# Altium PCB M_DOT_2_SOM.PcbDoc
Units mil, origin at the board's own origin, x right, y up, seen from the top; angles counter-clockwise.
Board outline 873.14 x 1656.07 mil, 6 copper layers (Top Layer [SIG], Mid Layer 1 [GND], Mid Layer 2 [SIG], Mid Layer 3 [3V3], Mid Layer 4 [GND], Bottom Layer [SIG]), stack 63.562 mil thick; 36 components, 52 nets, 312 pads, 71 vias.
Unrouted connection lines stored in the file: 100.
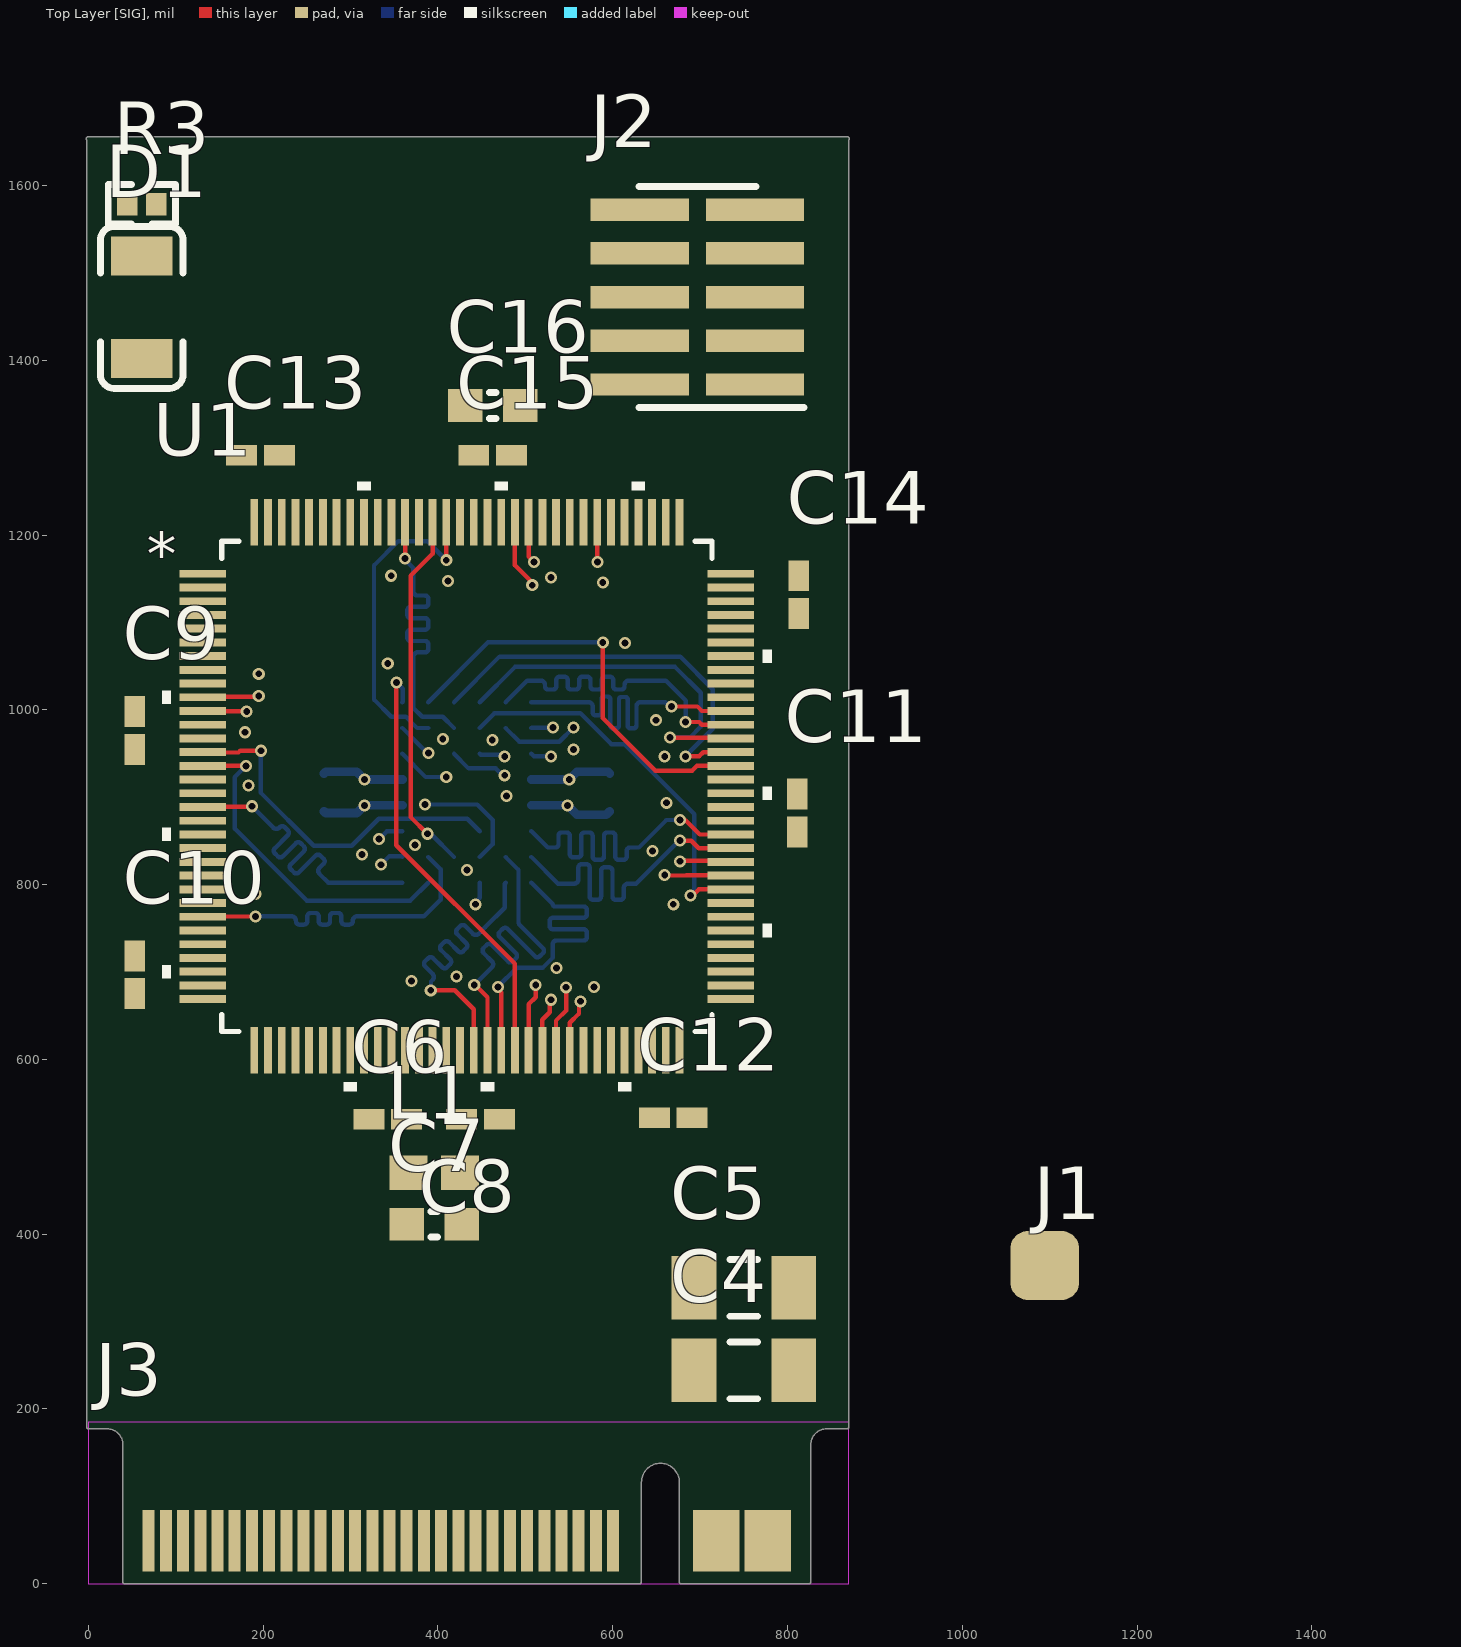
[diagram p0: Top Layer [SIG] view]
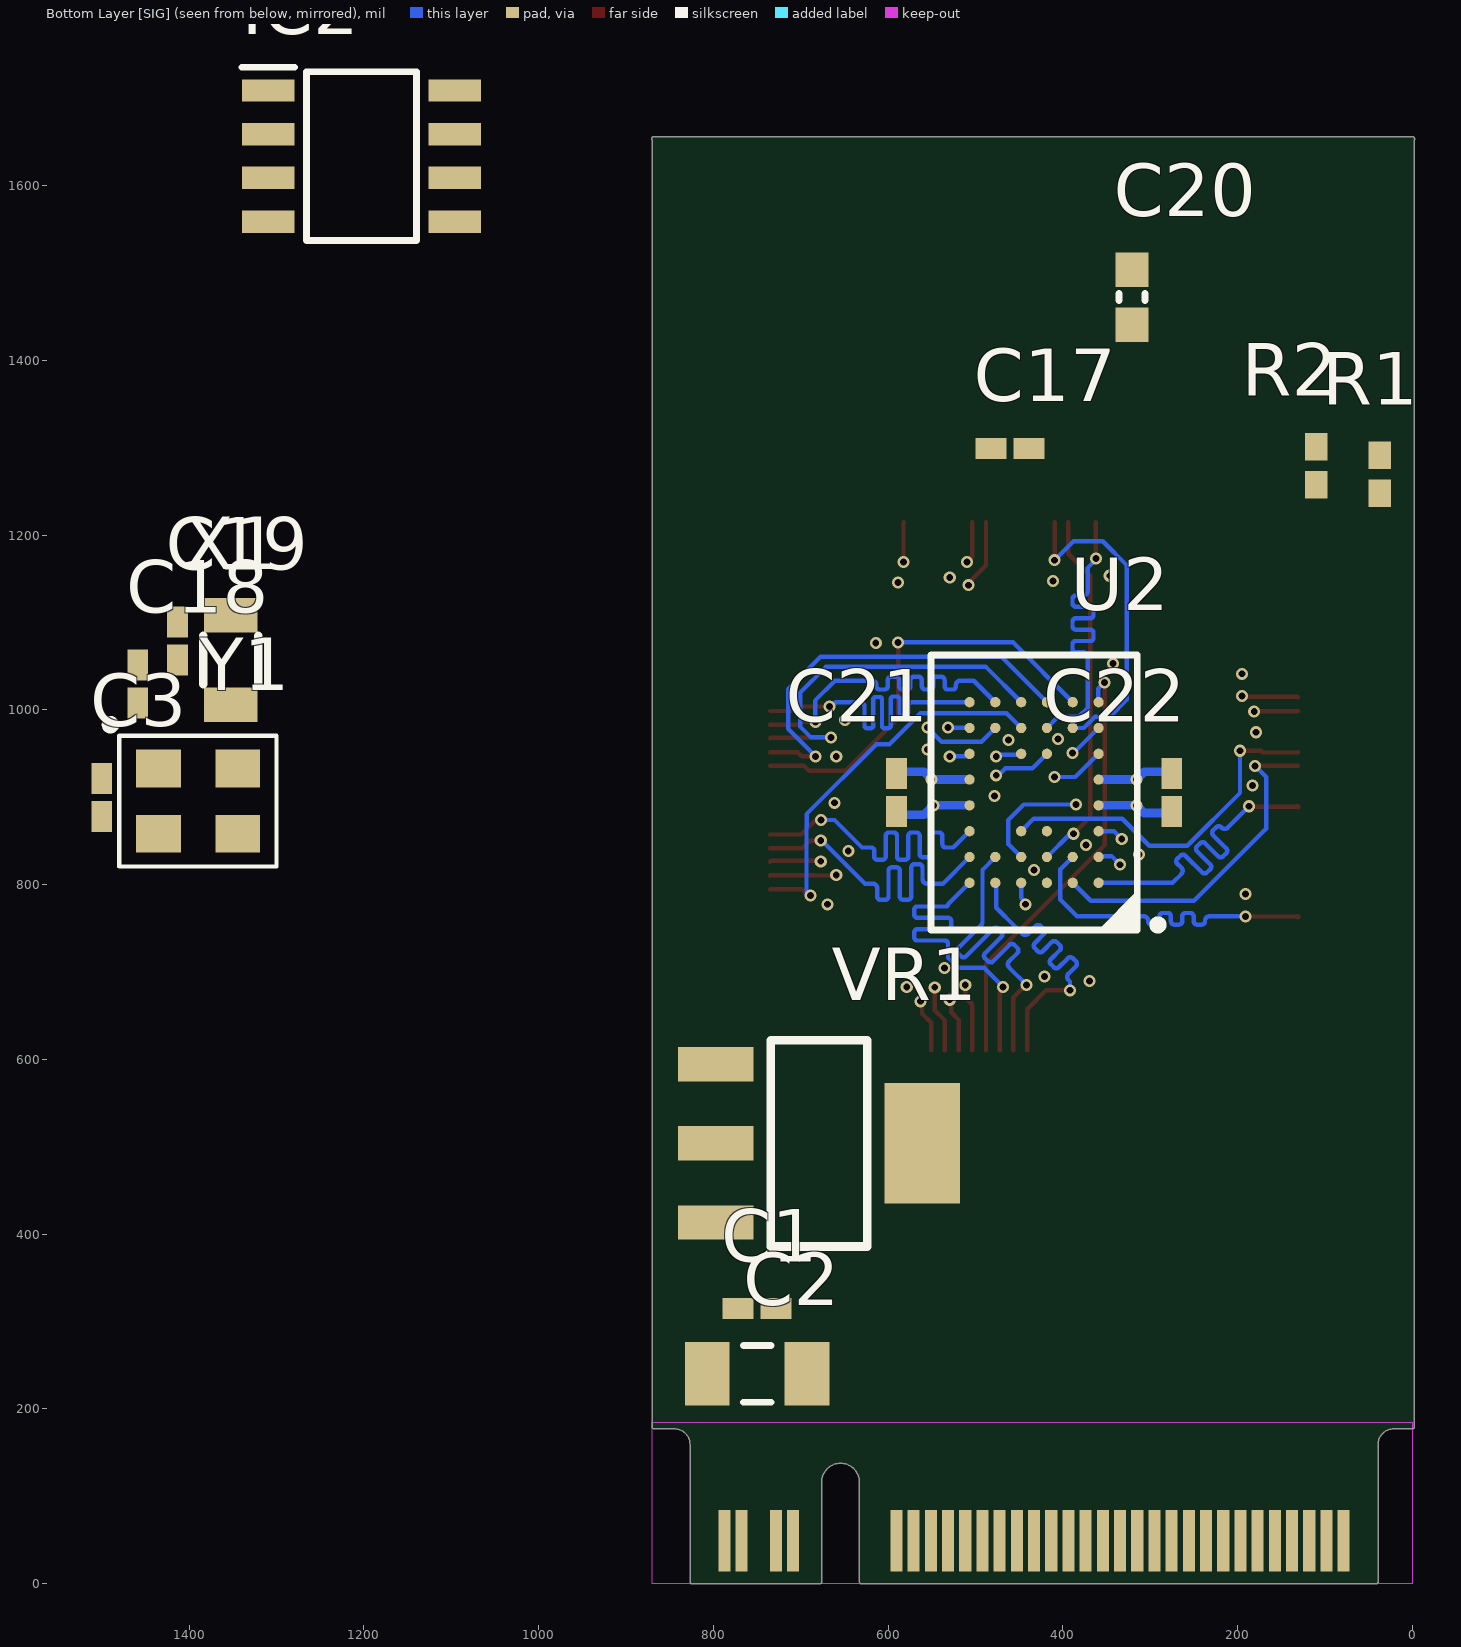
[diagram p1: Bottom Layer [SIG] view, seen from below]
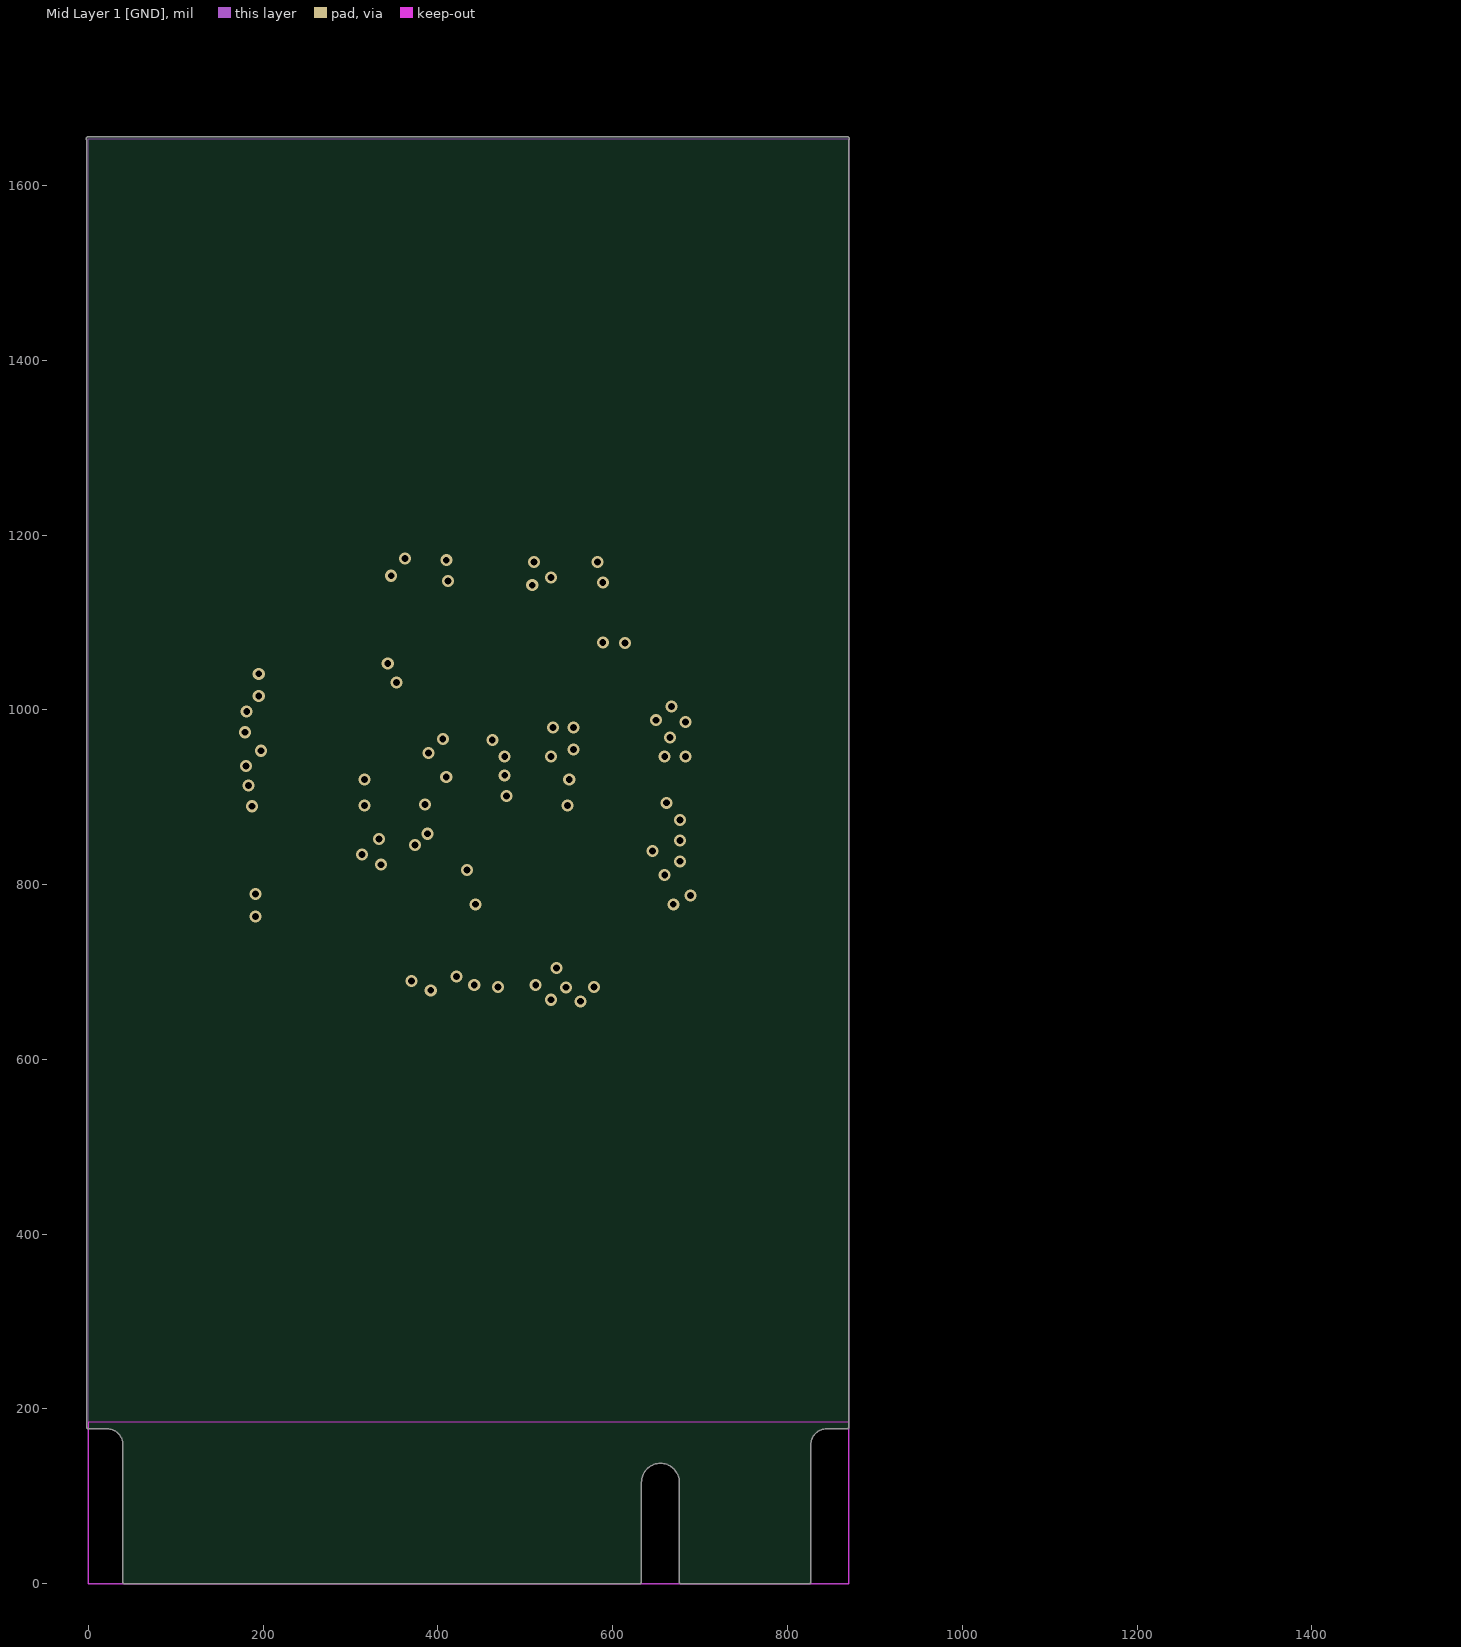
[diagram p2: Mid Layer 1 [GND]]
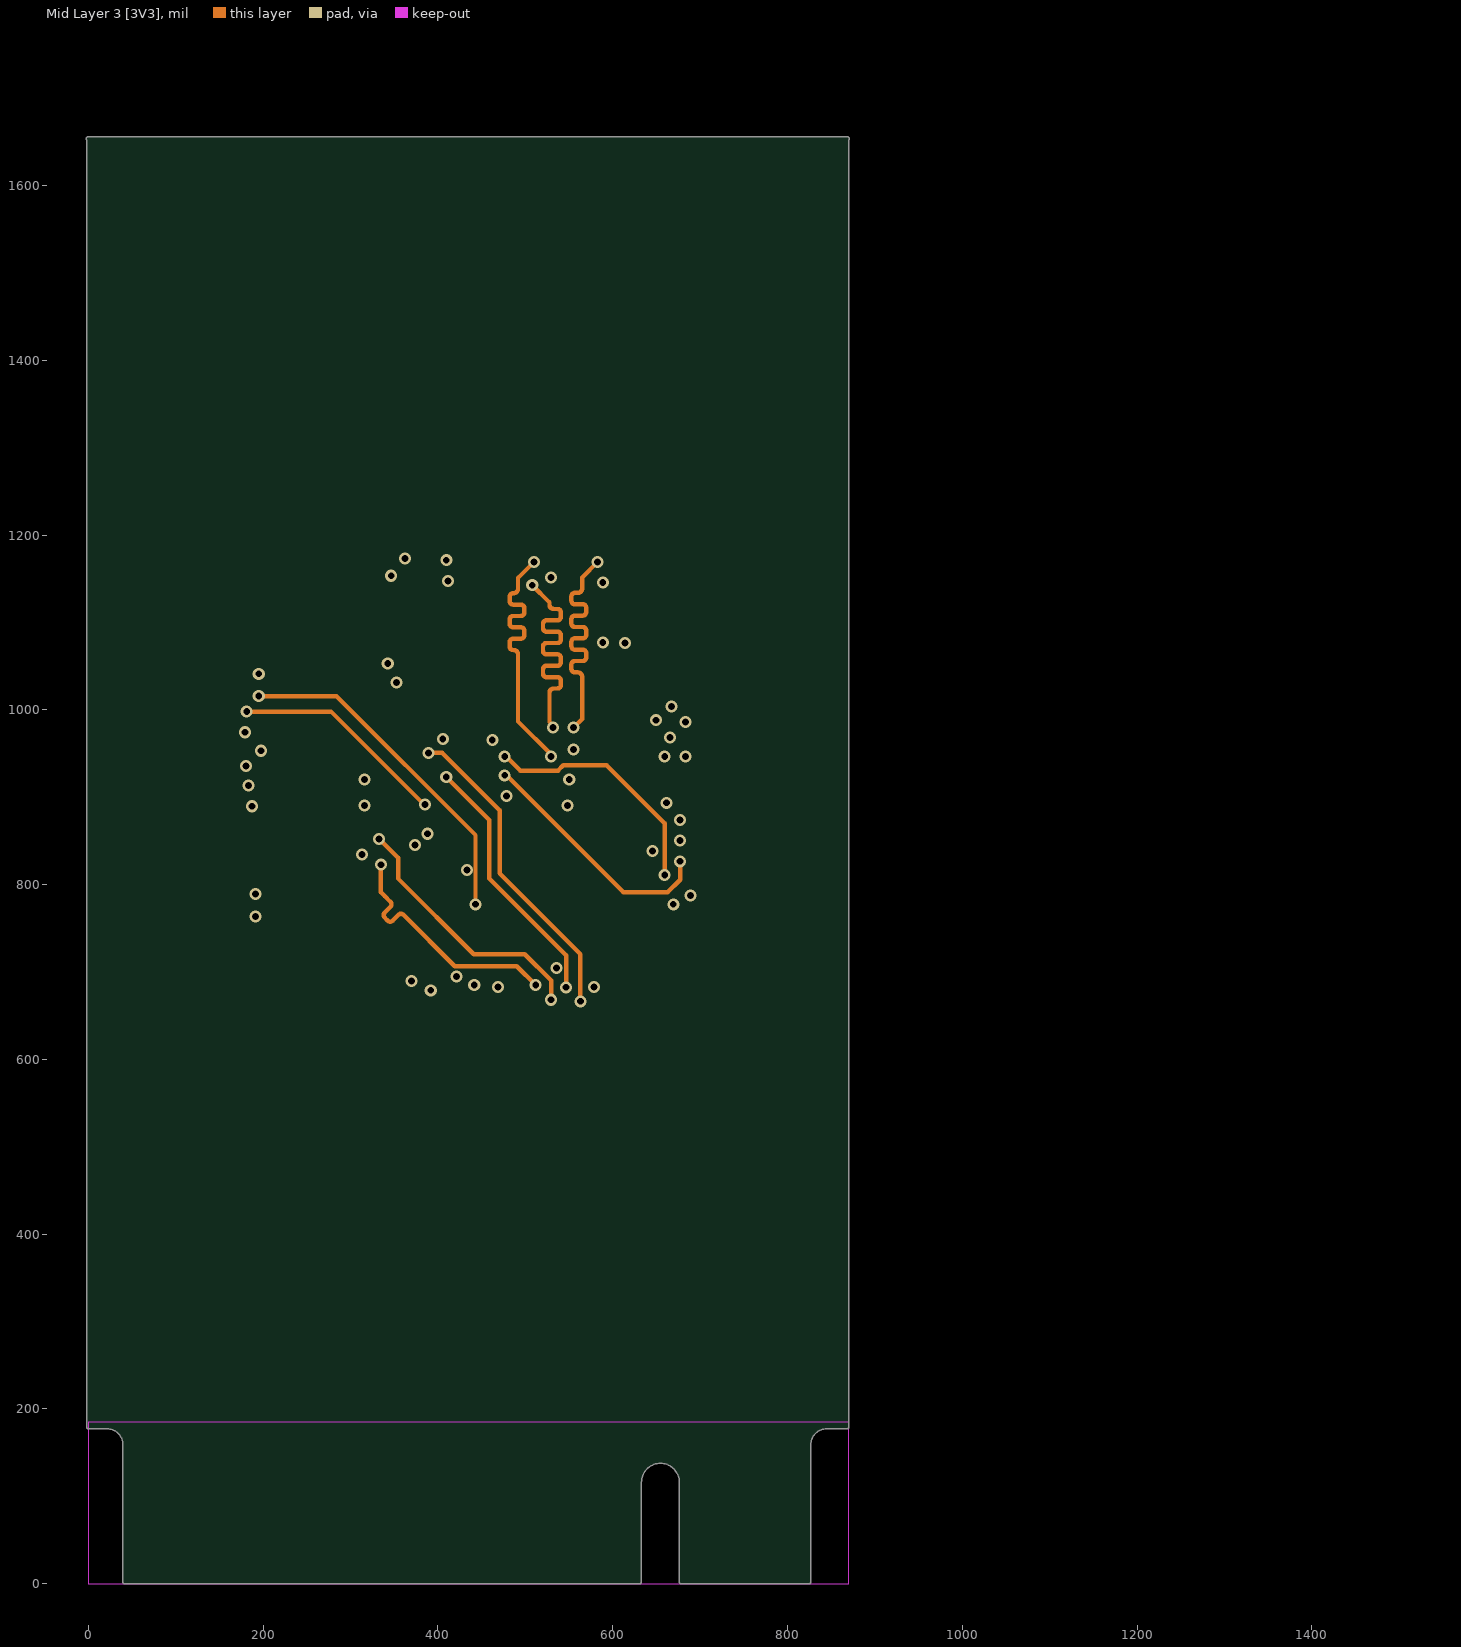
[diagram p3: Mid Layer 3 [3V3]]
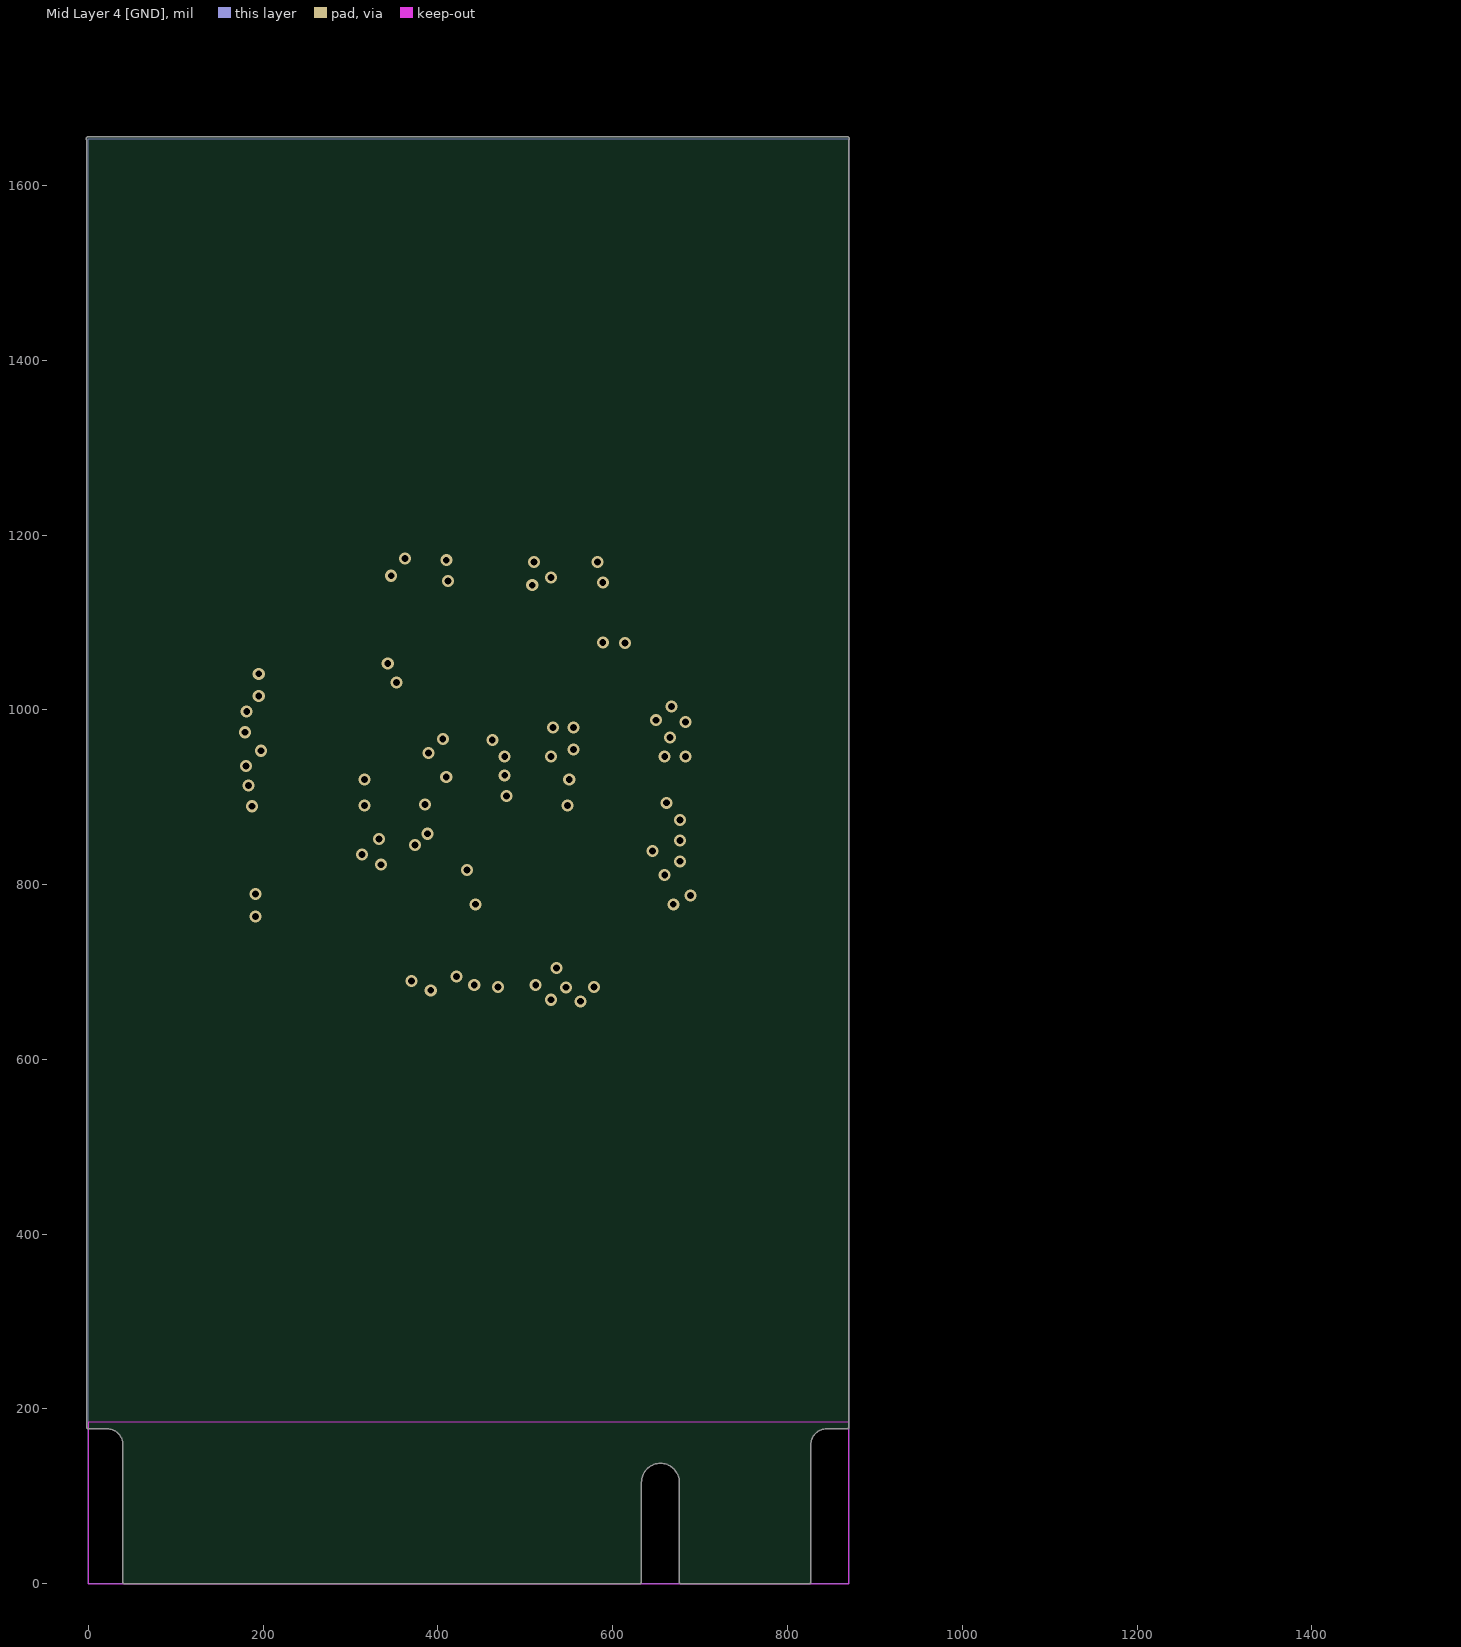
[diagram p4: Mid Layer 4 [GND]]

## Layer stack, top to bottom
Top Solder: solder mask 0.5, Solder Resist, Dk 3.8
Top Layer [SIG]: signal copper 1.3778
Dielectric 1: prepreg 3.937, 2313, Dk 4.05
Mid Layer 1 [GND]: signal copper 1.3779
Core 1: core 22.2441, FR-4, Dk 4.5
Mid Layer 2 [SIG]: signal copper 0.6889
Dielectric 2: prepreg 5, 2116, Dk 4.25
Mid Layer 3 [3V3]: signal copper 0.6889
Core 2: core 22.2441, FR-4, Dk 4.5
Mid Layer 4 [GND]: signal copper 0.6889
Dielectric 3: prepreg 3.937, 2313, Dk 4.05
Bottom Layer [SIG]: signal copper 1.3778
Bottom Solder: solder mask 0.5, Solder Resist, Dk 3.8

## Board outline
41.34,-0.01 630.91,-0.01 ccw(c630.91,1.97) 632.89,1.97 632.89,116.14 cw(c654.53,116.14) 676.17,116.14 676.17,1.97 ccw(c678.15,1.97) 678.17,-0.01 824.8,-0.01 ccw(c824.8,1.97) 826.79,1.97 826.79,159.45 cw(c844.49,159.45) 844.49,177.15 866.14,177.15 ccw(c866.14,179.13) 867.13,177.41 ccw(c868.11,179.13) 870.09,179.13 870.09,1652 ccw(c868.11,1653.54) 870.63,1653.54 ccw(c868.11,1653.54) 868.11,1656.06 0,1656.06 ccw(c0,1653.54) -1.98,1652 -1.98,179.17 ccw(c0,179.13) 0,177.15 21.65,177.15 cw(c21.65,159.45) 39.36,159.45 39.36,1.97 ccw(c41.34,1.97)

## Design rules (kind name [scope] priority, off if disabled: settings)
BoardOutlineClearance [All] p1: gap=7.87 ignorepadtopadclearanceinfootprint=FALSE
Clearance [All] p1: gap=3.5 ignorepadtopadclearanceinfootprint=FALSE except(5: Arc-Via Track-Via SMDPad-Via THPad-Via Via-Via Via-Fill Via-Poly Via-Region Via-Text; 9.84: Arc-Hole Track-Hole SMDPad-Hole THPad-Hole Via-Hole Fill-Hole Poly-Hole Region-Hole Text-Hole)
ComponentClearance [All] p1: gap=3.5 collisioncheckmode=3 verticalgap=3.5 showdistances=TRUE
DiffPairsRouting [All] p1: maxlimit=3.5 minlimit=3.5 mostfreqgap=3.5 toplayer_minwidth=3.5 toplayer_maxwidth=71497.94 toplayer_prefwidth=3.5 midlayer1_minwidth=3.5 midlayer1_maxwidth=71497.94 midlayer1_prefwidth=3.5 midlayer2_minwidth=3.5 midlayer2_maxwidth=71497.94 midlayer2_prefwidth=3.5 midlayer3_minwidth=3.5 midlayer3_maxwidth=71497.94 midlayer3_prefwidth=3.5 midlayer4_minwidth=3.5 midlayer4_maxwidth=71497.94 midlayer4_prefwidth=3.5 bottomlayer_minwidth=3.5 bottomlayer_maxwidth=71497.94 bottomlayer_prefwidth=3.5 maxuncoupledlength=500
Height [All] p1: minheight=0 maxheight=71497.94 prefheight=500
HoleSize [All] p1: absolutevalues=TRUE maxlimit=248.03 minlimit=7.87 maxpercent=80.000 minpercent=20.000
HoleToHoleClearance [All] p1: gap=9.84 allowstackedmicrovias=FALSE
MinimumAnnularRing [All] p1: minimumring=3
MinimumSolderMaskSliver [All] p1: minsoldermaskwidth=0
PlaneClearance [All] p1: clearance=3.5
PlaneConnect PlaneConnectPowerPads [InPadClass('PowerPads')] p1: planeconnectstyle=Direct reliefexpansion=20 reliefentries=4 reliefconductorwidth=10 reliefairgap=10
PlaneConnect [All] p2: pad.planeconnectstyle=Relief pad.reliefexpansion=11.81 pad.reliefentries=4 pad.reliefconductorwidth=3.5 pad.reliefairgap=3.5 via.planeconnectstyle=Direct via.reliefexpansion=11.81 via.reliefentries=4 via.reliefconductorwidth=5 via.reliefairgap=5
PolygonConnect PolygonConnectPowerPads [All vs (InPadClass('PowerPads'))] p1: connectstyle=Direct reliefconductorwidth=10 reliefentries=4 polygonreliefangle="90 Angle" airgapwidth=10
PolygonConnect [All] p2: thpad.connectstyle=Relief thpad.reliefconductorwidth=3.5 thpad.reliefentries=4 thpad.polygonreliefangle="90 Angle" thpad.airgapwidth=3.5 smdpad.connectstyle=Relief smdpad.reliefconductorwidth=3.5 smdpad.reliefentries=4 smdpad.polygonreliefangle="90 Angle" smdpad.airgapwidth=3.5 via.connectstyle=Direct via.reliefconductorwidth=5 via.reliefentries=4 via.polygonreliefangle="90 Angle" via.airgapwidth=5
RoutingVias [All] p1: holewidth=7.87 width=13.78 viastyle="Through Hole" minholewidth=7.87 minwidth=13.78 maxholewidth=11.81 maxwidth=19.68
SilkToSilkClearance [All] p1: silktosilkclearance=0
SilkToSolderMaskClearance [IsPad] p1: minsilkscreentomaskgap=3.5 clearancetoexposedcopper=TRUE
SolderMaskExpansion [All] p1: expansion=2.95 istentingtop=FALSE
Width [All] p1: maxlimit=71497.94 minlimit=3.5 preferedwidth=3.5
20 further rules are at their usual default settings.

## Classes and differential pairs
net class SDRAM_ACC: FMC_A0 FMC_A1 FMC_A2 FMC_A3 FMC_A4 FMC_A5 FMC_A6 FMC_A7 FMC_A8 FMC_A9 FMC_A10 FMC_A11 FMC_A12 FMC_A13 FMC_A14 FMC_A15 FMC_A16 FMC_A17 FMC_A18 FMC_CE FMC_OE FMC_WE
net class SDRAM_DATA: FMC_D0 FMC_D1 FMC_D2 FMC_D3 FMC_D4 FMC_D5 FMC_D6 FMC_D7

## Components (designator, comment, footprint, x,y, rotation, side; value= is the part's Value field where it differs from the comment)
C1 "100n" 0402C 750,314.96 r0 bottom
C2 "22u" 1206C 750,240.16 r0 bottom
C3 "100n" 0402C 1500,899.61 r90 bottom
C4 "22u" 1206C 750,244.09 r0 top
C5 "22u" 1206C 750,338.58 r0 top
C6 "100n" 0402C 342.52,531.5 r180 top
C7 "10u" 0603CH 395.67,411.42 r0 top
C8 "100n" 0402C 448.82,531.5 r0 top
C9 "100n" 0402C 53.15,976.38 r270 top
C10 "100n" 0402C 53.15,696.85 r270 top
C11 "100n" 0402C 811.02,881.89 r90 top
C12 "100n" 0402C 669.29,533.46 r0 top
C13 "100n" 0402C 196.85,1291.34 r180 top
C14 "100n" 0402C 812.99,1131.89 r90 top
C15 "100n" 0402C 462.6,1291.34 r180 top
C16 "10u" 0603CH 462.6,1348.43 r0 top
C17 "100n" 0402C 460.63,1299.21 r180 bottom
C18 "8p2" 0402C 1458.66,1029.53 r270 bottom
C19 "8p2" 0402C 1413.39,1078.74 r90 bottom
C20 "10u" 0603CH 320.87,1472.44 r270 bottom
C21 "100n" 0402C 590.55,905.51 r270 bottom
C22 "100n" 0402C 275.59,905.51 r90 bottom
D1 "µC" 1206_C 61.02,1460.63 r90 top
IC2 "M24C02-WMN6TP" SOIC127P600X175-8N 1202.76,1633.86 r180 bottom
J1 "Testpoint" TESTPOINT 1094.49,364.17 r0 top
J2 "M50-3600542R" HUSSP10W40P127_2X5_635X340X420P 696.85,1472.44 r90 top
J3 "M.2 B Key" "M.2 Key B" 0,179.13 r0 top
L1 "1000E 100MHZ" 0603L 395.67,470.47 r180 top
R1 "10K" 0402R 37.4,1269.68 r270 bottom
R2 "10K" 0402R 110.24,1279.53 r270 bottom
R3 "Res2" 0402_R 61.02,1578.74 r0 top value=1k
U1 "STM32G474QET6" LPQFP-128 433.07,912.43 r0 top locked
U2 "IS61WV5128EDBLL-10BLI" ISSI-TF-BGA-36-6000x8000DE 433.07,905.51 r0 bottom locked
VR1 "AMS1117-3.3" SOT-223 679.13,503.94 r0 bottom
X1 "32.768kHz" XTAL32768 1352.36,1057.09 r270 bottom
Y1 "Oscillator" "Crystal SMD3225" 1435.04,933.07 r180 bottom

## Footprints (in the part's own frame and the unit in brackets; to place one, negate y for a bottom-side part, rotate by r counter-clockwise, add the part's x,y. Pads: shape width x height; smd on the part's side, far side on the other; paste and mask are expansions set on the pad)
0402_R [mm]
  rect 0.6x0.65 smd mask+0.051: 1(-0.425,0) 2(0.425,0)
  silkscreen extent -0.97,-0.58 0.97,0.58, body extent -0.57,-0.27 0.58,0.28, height 0.41
0402C [mm] "Chip Capasitor, Body 1,0x0,5mm, IPC Density Medium"
  rect 0.9x0.6 smd: 1(-0.55,0) 2(0.55,0)
  body extent -0.5,-0.25 0.5,0.25, height 0.6
0402R [mm] "Chip Resistor, 2-Leads, Body 1.0x0.5mm, IPC Medium Density"
  rect 0.8x0.65 smd: 1(-0.55,0) 2(0.55,0)
  body extent -0.5,-0.27 0.5,0.23, height 0.35
0603CH [mm] "Chip Capasitor, Body 1.6x0.8mm, IPC Density Medium"
  rect 1x0.95 smd: 1(-0.8,0) 2(0.8,0)
  silkscreen extent -0.1,-0.38 0.1,0.38, body extent -0.8,-0.4 0.8,0.4, height 0.9
0603L [mm] "Chip Inductor, 2-Leads, Body 1.6x0.8mm, IPC Medium Density"
  rect 1.1x1 smd: 1(-0.75,0) 2(0.75,0)
  body extent -0.8,-0.4 0.8,0.4, height 0.45
1206_C [mm]
  rect 1.13x1.8 smd: 1(-1.49,0) 2(1.49,0)
  silkscreen extent -2.36,-1.2 2.35,1.2, body extent -1.6,-0.81 1.6,0.79, height 1
1206C [mm] "Chip Capasitor, Body 3.2x1.6mm, IPC Density Medium"
  rect 1.3x1.85 smd: 1(-1.45,0) 2(1.45,0)
  silkscreen extent -0.4,-0.82 0.4,0.82, body extent -1.6,-0.8 1.6,0.8, height 1.25
"Crystal SMD3225" [mm]
  rect 1.3x1.1 smd: 1(0,0) 2(0,-1.9) 3(2.3,-1.9) 4(2.3,0)
  silkscreen extent -1.52,-2.85 3.43,1.4, body extent -0.43,-2.19 2.77,0.31, height 0.6
HUSSP10W40P127_2X5_635X340X420P [mm]
  rect 0.65x2.85 smd: 1(-2.54,-1.675) 2(-2.54,1.675) 3(-1.27,-1.675) 4(-1.27,1.675) 5(0,-1.675) 6(0,1.675) 7(1.27,-1.675) 8(1.27,1.675) 9(2.54,-1.675) 10(2.54,1.675)
  silkscreen extent -3.21,-3.1 3.21,1.7, body extent -3.32,-2.75 3.32,2.75, height 5.13
ISSI-TF-BGA-36-6000x8000DE [mm] "BGA, 36-Balls, Body 8x6mm, Pitch 0.75mm"
  round 0.3 smd: A1(-1.875,2.625) A2(-1.125,2.625) A3(-0.375,2.625) A4(0.375,2.625) A5(1.125,2.625) A6(1.875,2.625) B1(-1.875,1.875) B2(-1.125,1.875) B3(-0.375,1.875) B4(0.375,1.875) B5(1.125,1.875) B6(1.875,1.875) C1(-1.875,1.125) C3(-0.375,1.125) C4(0.375,1.125) C6(1.875,1.125) D1(-1.875,0.375) D6(1.875,0.375) E1(-1.875,-0.375) E6(1.875,-0.375) F1(-1.875,-1.125) F3(-0.375,-1.125) F4(0.375,-1.125) F6(1.875,-1.125) G1(-1.875,-1.875) G2(-1.125,-1.875) G3(-0.375,-1.875) G4(0.375,-1.875) G5(1.125,-1.875) G6(1.875,-1.875) H1(-1.875,-2.625) H2(-1.125,-2.625) H3(-0.375,-2.625) H4(0.375,-2.625) H5(1.125,-2.625) H6(1.875,-2.625)
  silkscreen extent -3.72,-4 3,4, body extent -3,-4 3,4, height 1.2
LPQFP-128 [mil]
  rect 53.28x9 smd paste+0 mask+0: 1(-302.14,243.35) 2(-302.14,227.65) 3(-302.14,211.95) 4(-302.14,196.25) 5(-302.14,180.55) 6(-302.14,164.85) 7(-302.14,149.15) 8(-302.14,133.45) 9(-302.14,117.75) 10(-302.14,102.05) 11(-302.14,86.35) 12(-302.14,70.65) 13(-302.14,54.95) 14(-302.14,39.25) 15(-302.14,23.55) 16(-302.14,7.85) 17(-302.14,-7.85) 18(-302.14,-23.55) 19(-302.14,-39.25) 20(-302.14,-54.95) 21(-302.14,-70.65) 22(-302.14,-86.35) 23(-302.14,-102.05) 24(-302.14,-117.75) 25(-302.14,-133.45) 26(-302.14,-149.15) 27(-302.14,-164.85) 28(-302.14,-180.55) 29(-302.14,-196.25) 30(-302.14,-211.95) 31(-302.14,-227.65) 32(-302.14,-243.35) 65(302.14,-243.35) 66(302.14,-227.65) 67(302.14,-211.95) 68(302.14,-196.25) 69(302.14,-180.55) 70(302.14,-164.85) 71(302.14,-149.15) 72(302.14,-133.45) 73(302.14,-117.75) 74(302.14,-102.05) 75(302.14,-86.35) 76(302.14,-70.65) 77(302.14,-54.95) 78(302.14,-39.25) 79(302.14,-23.55) 80(302.14,-7.85) 81(302.14,7.85) 82(302.14,23.55) 83(302.14,39.25) 84(302.14,54.95) 85(302.14,70.65) 86(302.14,86.35) 87(302.14,102.05) 88(302.14,117.75) 89(302.14,133.45) 90(302.14,149.15) 91(302.14,164.85) 92(302.14,180.55) 93(302.14,196.25) 94(302.14,211.95) 95(302.14,227.65) 96(302.14,243.35)
  rect 9x53.28 smd paste+0 mask+0: 33(-243.35,-302.14) 34(-227.65,-302.14) 35(-211.95,-302.14) 36(-196.25,-302.14) 37(-180.55,-302.14) 38(-164.85,-302.14) 39(-149.15,-302.14) 40(-133.45,-302.14) 41(-117.75,-302.14) 42(-102.05,-302.14) 43(-86.35,-302.14) 44(-70.65,-302.14) 45(-54.95,-302.14) 46(-39.25,-302.14) 47(-23.55,-302.14) 48(-7.85,-302.14) 49(7.85,-302.14) 50(23.55,-302.14) 51(39.25,-302.14) 52(54.95,-302.14) 53(70.65,-302.14) 54(86.35,-302.14) 55(102.05,-302.14) 56(117.75,-302.14) 57(133.45,-302.14) 58(149.15,-302.14) 59(164.85,-302.14) 60(180.55,-302.14) 61(196.25,-302.14) 62(211.95,-302.14) 63(227.65,-302.14) 64(243.35,-302.14) 97(243.35,302.14) 98(227.65,302.14) 99(211.95,302.14) 100(196.25,302.14) 101(180.55,302.14) 102(164.85,302.14) 103(149.15,302.14) 104(133.45,302.14) 105(117.75,302.14) 106(102.05,302.14) 107(86.35,302.14) 108(70.65,302.14) 109(54.95,302.14) 110(39.25,302.14) 111(23.55,302.14) 112(7.85,302.14) 113(-7.85,302.14) 114(-23.55,302.14) 115(-39.25,302.14) 116(-54.95,302.14) 117(-70.65,302.14) 118(-86.35,302.14) 119(-102.05,302.14) 120(-117.75,302.14) 121(-133.45,302.14) 122(-149.15,302.14) 123(-164.85,302.14) 124(-180.55,302.14) 125(-196.25,302.14) 126(-211.95,302.14) 127(-227.65,302.14) 128(-243.35,302.14)
  silkscreen extent -349,-349 349,349, body extent -315,-315 315,315, height 63
"M.2 Key B" [mm]
  rect 0.35x1.8 smd: 1(20.25,-3.3) 5(19.25,-3.3) 7(18.75,-3.3) 11(17.75,-3.3) 21(15.25,-3.3) 23(14.75,-3.3) 25(14.25,-3.3) 27(13.75,-3.3) 29(13.25,-3.3) 31(12.75,-3.3) 33(12.25,-3.3) 35(11.75,-3.3) 37(11.25,-3.3) 39(10.75,-3.3) 41(10.25,-3.3) 43(9.75,-3.3) 45(9.25,-3.3) 47(8.75,-3.3) 49(8.25,-3.3) 51(7.75,-3.3) 53(7.25,-3.3) 55(6.75,-3.3) 57(6.25,-3.3) 59(5.75,-3.3) 61(5.25,-3.3) 63(4.75,-3.3) 65(4.25,-3.3) 67(3.75,-3.3) 69(3.25,-3.3) 71(2.75,-3.3) 73(2.25,-3.3) 75(1.75,-3.3)
  rect 0.35x1.8 smd far side: 2(20,-3.3) 4(19.5,-3.3) 8(18.5,-3.3) 10(18,-3.3) 22(15,-3.3) 24(14.5,-3.3) 26(14,-3.3) 28(13.5,-3.3) 30(13,-3.3) 32(12.5,-3.3) 34(12,-3.3) 36(11.5,-3.3) 38(11,-3.3) 40(10.5,-3.3) 42(10,-3.3) 44(9.5,-3.3) 46(9,-3.3) 48(8.5,-3.3) 50(8,-3.3) 52(7.5,-3.3) 54(7,-3.3) 56(6.5,-3.3) 58(6,-3.3) 60(5.5,-3.3) 62(5,-3.3) 64(4.5,-3.3) 66(4,-3.3) 68(3.5,-3.3) 70(3,-3.3) 72(2.5,-3.3) 74(2,-3.3)
  rect 1.016x1.8 smd: 3(19.75,-3.3) 9(18.25,-3.3)
  Keep-Out Layer region: 0,-4.55 22.1,-4.55 22.1,0.15 0,0.15
SOIC127P600X175-8N [mm]
  rect 1.525x0.65 smd: 1(-2.712,1.905) 2(-2.712,0.635) 3(-2.712,-0.635) 4(-2.712,-1.905) 5(2.712,-1.905) 6(2.712,-0.635) 7(2.712,0.635) 8(2.712,1.905)
  silkscreen extent -3.47,-2.45 1.6,2.58, body extent -3,-2.45 3,2.45, height 1.75
SOT-223 [mm]
  rect 2.2x1 smd: 1(3,-2.3) 2(3,0) 3(3,2.3)
  rect 2.2x3.5 smd: 2(-3,0)
  silkscreen extent -1.4,-3 1.4,3, body extent -3.49,-3.24 3.49,3.24, height 1.64
TESTPOINT [mm] "Testpunkt"
  rrect50% 2x2 smd: 1(0,0)
XTAL32768 [mm] "AVX/Kyocera Crystal Oscillator 32.768kHz 12.5pF SMD"
  rect 1x1.55 smd: 1(-1.3,0) 2(1.3,0)
  silkscreen extent -0.7,-0.8 0.7,0.8, body extent -1.6,-0.75 1.6,0.75, height 0.9

## Part data
C1 C2 C3 C4 C5 C6 C7 C8 C9 C10 C11 C12 C13 C14 C15 C16 C17 C18 C19 C20 C21 C22: library part "Cap Ceramic", "Kondensator"
D1: library part LED2, "Typical RED, GREEN, YELLOW, AMBER GaAs LED", LatestRevisionDate=17-Jul-2002, LatestRevisionNote="Re-released for DXP Platform.", PackageDescription="SM LED; 2 Flat Leads", PackageReference=3.2X1.6X1.1, PackageVersion=Feb-2002, Published=8-Jun-2000, Publisher="Altium Limited"
IC2: "Integrated Circuit", Manufacturer_Name=STMicroelectronics, Mouser Part Number=511-M24C02-WMN6TP, Arrow Part Number=M24C02-WMN6TP, Arrow Price/Stock=https://www.arrow.com/en/products/m24c02-wmn6tp/stmicroelectronics, Datasheet Link=http://www.st.com/st-web-ui/static/active/en/resource/technical/document/datasheet/DM00071904.pdf, Height=1.75mm, Manufacturer_Part_Number=M24C02-WMN6TP, Mouser Price/Stock=https://www.mouser.co.uk/ProductDetail/STMicroelectronics/M24C02-WMN6TP?qs=%252B9pWl1iD4MV6%252BhhMP%2F%252BxlQ%3D%3D
J1: library part "Header 1", "Header, 1-Pin", LatestRevisionDate=17-Jul-2002, LatestRevisionNote="Re-released for DXP Platform.", Publisher="Altium Limited"
J2: "Connector", Manufacturer_Name=Harwin, Mouser Part Number=855-M50-3600542R, Datasheet Link=https://cdn.harwin.com/pdfs/M50-360R.pdf, Manufacturer_Part_Number=M50-3600542R, Mouser Price/Stock=https://www.mouser.co.uk/ProductDetail/Harwin/M50-3600542R?qs=DVxm2sPGGrrPu%2FxuhpV3yw%3D%3D
L1: library part Inductor
R1 R2: library part Resistor, "Widerstand"
R3: "Resistor", LatestRevisionDate=17-Jul-2002, LatestRevisionNote="Re-released for DXP Platform.", PackageDescription="Axial Device, Thru-Hole; 2 Leads; 0.4 in Pin Spacing", PackageReference=AXIAL-0.4, Published=8-Jun-2000, Publisher="Altium Limited"
U1: "No Description Available", Mfr_Name=STMicroelectronics, RefDes=RefDes, Type=Type
U2: library part CMP-0513-00078-1, "4 M High Speed Asynchronous CMOS SRAM with ECC, 512 K x 8, -40 to 85 degC, 36-Pin BGA (TF-BGA-36), Pb-Free", Manufacturer="Integrated Silicon Solution Inc (ISSI)", Code_JEDEC=MO-207, ComponentLink1Description="Manufacturer URL", ComponentLink1URL=http://www.issi.com/US/index.shtml, ComponentLink2Description=Datasheet, ComponentLink2URL=http://www.issi.com/WW/pdf/61-64WV5128EDBLL.pdf, ComponentLink3Description="Package Specification", ComponentLink3URL=http://www.issi.com/WW/pdf/62-65WV2568DALL_BLL.pdf, DatasheetVersion="Rev. F", Density=4M, Mounting Technology="Surface Mount", Organization="512K x 8", PackageDescription="36-Pin 6 x 8 mm TF-BGA, Pitch 0.75 mm", PackageReference=TF-BGA-36, PackageVersion="Rev. E, 08/2008", Packing="Tray / Tube", PartNumber=IS61WV5128EDBLL-10BLI, RoHS=Pb-Free, Speed (ns)=10
VR1: library part "SOT-223 AMS1117-3.3", "???????(LDO)", Package=SOT-223, SuppliersPartNumber=C6186, ComponentLink1Description=?????, ComponentLink1URL=http://www.szlcsc.com/product/details_6652.html, Supplier=LC
X1: library part XTAL, "Crystal Oscillator", LatestRevisionDate=17-Jul-2002, LatestRevisionNote="Re-released for DXP Platform.", PackageReference=R38, Published=8-Jun-2000, Publisher="Altium Limited"

## Via types
v1: diameter 13.78, hole 7.87, Top Layer [SIG] to Bottom Layer [SIG], 71 vias

## Nets (pads, with @x,y where several pads share a name; then routed paths per layer and width w, separated by ;. In a path a pad name is that pad's centre, name@x,y a point inside that pad or via, vN(x,y) a via of type N, cw(c..) or ccw(c..) an arc to the next point about the centre after c; other vN are vias at no path point)
3V3: C3.2 C4.2 C5.2 C8.2 C9.2 C10.2 C11.2 C12.2 C13.2 C14.2 C15.2 C16.1 C17.2 C20.1 C21.2 C22.2 IC2.8 J2.2 J3.1 J3.3 J3.5 L1.1 R1.1 R2.1 U1.13 U1.31 U1.47 U1.64 U1.79 U1.95 U1.111 U1.128 U2.D6 U2.E1 VR1.2 Y1.1 Y1.4 | length 189.7
  Bottom Layer [SIG] w10: C22.2@269.69,927.17 271.65,929.13 307.09,929.13 v1(315.95,920.28) U2.E1 ; U2.D6 v1(548.23,890.75) 559.06,879.92 592.52,879.92 C21.2@596.46,883.86
3V3_AN: C6.2 C7.1 L1.2 U1.45
5V-17V: C1.2 C2.2 J3.2 J3.4 VR1.3
FMC_A0: U1.18 U2.A1 | length 391.5
  Top Layer [SIG] w5: U1.18@131.37,889.32 v1@186.56,889.32
  Top Layer [SIG] w6: U1.18 U1.18@131.37,889.32 ; v1@186.56,889.32 v1(187.01,889.76)
  Bottom Layer [SIG] w5: v1(187.01,889.76) 209.67,867.11 211.43,865.34 ccw(c214.97,868.87) 218.5,865.34 219,865.83 cw(c221.75,863.07) 224.51,865.83 228.19,862.15 cw(c225.43,859.39) 228.19,856.64 213.1,841.54 ccw(c215.85,838.79) 213.1,836.03 216.77,832.35 ccw(c219.53,835.11) 222.29,832.35 237.38,847.44 cw(c240.14,844.69) 242.9,847.44 246.57,843.77 cw(c243.82,841.01) 246.57,838.25 231.48,823.16 ccw(c234.24,820.4) 231.48,817.64 235.16,813.97 ccw(c237.92,816.73) 240.67,813.97 259.94,833.23 cw(c262.69,830.47) 265.45,833.23 269.13,829.55 cw(c266.37,826.8) 269.13,824.04 264.47,819.38 ccw(c268,815.84) 264.47,812.31 274.61,802.17 278.43,802.17 U2.A1
FMC_A1: U1.15 U2.A2 | length 390.6
  Top Layer [SIG] w5: U1.15 v1(180.16,935.98)
  Bottom Layer [SIG] w5: v1(180.16,935.98) 167.32,923.14 167.32,864.17 250,781.5 368.11,781.5 U2.A2
FMC_A2: U1.26 U2.B2 | length 385.9
  Top Layer [SIG] w5: U1.26@131.18,763.53 v1@190.69,763.53
  Top Layer [SIG] w6: U1.26 U1.26@131.18,763.53 ; v1@190.69,763.53 v1(190.94,763.78)
  Bottom Layer [SIG] w5: v1(190.94,763.78) 232.45,763.78 cw(c232.45,758.78) 237.45,758.78 237.45,758.23 ccw(c241.35,758.23) 241.35,754.33 246.55,754.33 ccw(c246.55,758.23) 250.45,758.23 250.45,763.72 cw(c254.35,763.72) 254.35,767.62 259.55,767.62 cw(c259.55,763.72) 263.45,763.72 263.45,758.23 ccw(c267.35,758.23) 267.35,754.33 272.55,754.33 ccw(c272.55,758.23) 276.45,758.23 276.45,763.72 cw(c280.35,763.72) 280.35,767.62 285.55,767.62 cw(c285.55,763.72) 289.45,763.72 289.45,758.23 ccw(c293.35,758.23) 293.35,754.33 298.55,754.33 ccw(c298.55,758.23) 302.45,758.23 302.45,758.78 cw(c307.45,758.78) 307.45,763.78 326.77,763.78 383.86,763.78 403.03,782.95 403.03,817.45 U2.B2
FMC_A3: U1.10 U2.A4 | length 484.2
  Top Layer [SIG] w5: U1.10 131.57,1015.11 194.25,1015.11 v1(194.88,1015.75)
  Mid Layer 3 [3V3] w5: v1(194.88,1015.75) 283.93,1015.75 442.91,856.76 v1(442.91,777.56)
  Bottom Layer [SIG] w5: v1(442.91,777.56) 442.91,779.93 447.83,784.86 U2.A4
FMC_A4: U1.11 U2.B4 | length 431.8
  Top Layer [SIG] w5: U1.11 131.3,998.4 180.73,998.4 v1(181.1,998.03)
  Mid Layer 3 [3V3] w5: v1(181.1,998.03) 277.56,998.03 383.86,891.73 v1(384.92,891.73)
  Bottom Layer [SIG] w5: v1(384.92,891.73) 444.88,891.73 462.6,874.02 462.6,846.46 U2.B4
FMC_A5: U1.14 U2.C4 | length 410.4
  Top Layer [SIG] w5: U1.14 131.38,951.23 171.69,951.23 173.7,953.25 196.36,953.25 196.85,952.76 v1(197.34,953.25)
  Bottom Layer [SIG] w5: v1(197.34,953.25) 197.34,905.02 257.87,844.49 301.18,844.49 332.15,875.45 433.6,875.45 U2.C4
FMC_A6: U1.49 U2.A5 | length 375.7
  Top Layer [SIG] w5: v1(391.73,679.13) 419.24,679.13 440.92,657.45 U1.49
  Bottom Layer [SIG] w5: v1(391.73,679.13) 391.99,679.39 391.99,689.23 393.75,691 ccw(c390.22,694.53) 393.75,698.07 385.1,706.72 cw(c387.86,709.48) 385.1,712.24 388.78,715.91 cw(c391.54,713.16) 394.29,715.91 404.8,705.41 ccw(c407.56,708.16) 410.32,705.41 413.99,709.08 ccw(c411.24,711.84) 413.99,714.6 403.49,725.11 cw(c406.25,727.86) 403.49,730.62 407.16,734.3 cw(c409.92,731.54) 412.68,734.3 423.19,723.79 ccw(c425.94,726.55) 428.7,723.79 432.38,727.47 ccw(c429.62,730.23) 432.38,732.98 421.87,743.49 cw(c424.63,746.25) 421.87,749.01 425.55,752.68 cw(c428.31,749.93) 431.06,752.68 439.72,744.03 ccw(c443.25,747.57) 446.79,744.03 454.2,751.44 476.38,773.62 476.38,801.18 U2.A5
FMC_A7: U1.50 U2.B5 | length 421.4
  Top Layer [SIG] w5: v1(441.5,685.04) 442.67,685.04 456.66,671.06 456.66,610.32 U1.50
  Bottom Layer [SIG] w5: v1(441.5,685.04) 461.65,705.19 ccw(c458.11,708.73) 461.65,712.26 452.02,721.89 cw(c454.78,724.65) 452.02,727.4 455.7,731.08 cw(c458.46,728.32) 461.22,731.08 480.1,712.2 ccw(c482.86,714.96) 485.61,712.2 489.29,715.88 ccw(c486.53,718.64) 489.29,721.39 470.41,740.27 cw(c473.17,743.03) 470.41,745.79 474.09,749.47 cw(c476.84,746.71) 479.6,749.47 511.05,718.02 ccw(c513.8,720.78) 516.56,718.02 520.24,721.7 ccw(c517.48,724.46) 520.24,727.21 493.59,753.86 cw(c497.13,757.4) 492.13,757.4 492.13,797.24 492.13,816.93 U2.B5
FMC_A8: U1.51 U2.A6 | length 397.1
  Top Layer [SIG] w5: v1(468.5,683.07) 468.5,680.7 472.23,676.97 472.23,610.38 U1.51
  Bottom Layer [SIG] w5: v1(468.5,683.07) 490.16,704.72 519.68,704.72 531.5,716.54 531.5,723.04 531.5,732.14 cw(c535.4,732.14) 535.4,736.04 566.43,736.04 ccw(c566.43,739.94) 570.33,739.94 570.33,745.14 ccw(c566.43,745.14) 566.43,749.04 531.5,749.04 cw(c531.5,752.64) 527.89,752.64 527.89,758.43 cw(c531.5,758.43) 531.5,762.04 566.43,762.04 ccw(c566.43,765.94) 570.33,765.94 570.33,771.14 ccw(c566.43,771.14) 566.43,775.04 534.02,775.04 cw(c534.02,777.56) 531.5,777.56 U2.A6
FMC_A9: U1.52 U2.H1 | length 503.3
  Top Layer [SIG] w5: v1(352.36,1031.5) 352.36,845.09 488.02,709.43 U1.52
  Bottom Layer [SIG] w5: v1(352.36,1031.5) 359.74,1024.11 359.74,1009.35 U2.H1
FMC_A10: U1.82 U2.H2 | length 488.5
  Top Layer [SIG] w5: v1(588.58,1077.3) 588.58,990.76 648.77,930.57 691,930.57 696.4,935.98 U1.82
  Bottom Layer [SIG] w5: U2.H2 457.22,1077.3 v1(588.58,1077.3)
FMC_A11: U1.83 U2.H3 | length 477.3
  Top Layer [SIG] w5: v1(683.07,946.85) 698.82,946.85 703.65,951.68 U1.83
  Bottom Layer [SIG] w5: U2.H3 470.47,1061.02 677.17,1061.02 714.57,1023.62 714.57,978.35 v1(683.07,946.85)
FMC_A12: U1.84 U2.H4 | length 431.6
  Top Layer [SIG] w5: v1(665.35,968.5) 665.92,967.94 734.65,967.94 U1.84
  Bottom Layer [SIG] w5: U2.H4 488.19,1049.21 671.26,1049.21 700.79,1019.69 700.79,980.91 688.38,968.5 v1(665.35,968.5)
FMC_A13: U1.85 U2.H5 | length 384.9
  Top Layer [SIG] w5: v1(683.07,986.22) 698.82,986.22 701.96,983.08 U1.85
  Bottom Layer [SIG] w5: U2.H5 501.97,1033.46 517.47,1033.46 cw(c517.47,1028.46) 522.47,1028.46 522.47,1027.21 ccw(c526.37,1027.21) 526.37,1023.31 531.57,1023.31 ccw(c531.57,1027.21) 535.47,1027.21 535.47,1034.14 cw(c539.37,1034.14) 539.37,1038.04 544.57,1038.04 cw(c544.57,1034.14) 548.47,1034.14 548.47,1027.21 ccw(c552.37,1027.21) 552.37,1023.31 557.57,1023.31 ccw(c557.57,1027.21) 561.47,1027.21 561.47,1034.14 cw(c565.37,1034.14) 565.37,1038.04 570.57,1038.04 cw(c570.57,1034.14) 574.47,1034.14 574.47,1027.21 ccw(c578.37,1027.21) 578.37,1023.31 583.57,1023.31 ccw(c583.57,1027.21) 587.47,1027.21 587.47,1034.14 cw(c591.37,1034.14) 591.37,1038.04 596.57,1038.04 cw(c596.57,1034.14) 600.47,1034.14 600.47,1027.21 ccw(c604.37,1027.21) 604.37,1023.31 609.57,1023.31 ccw(c609.57,1027.21) 613.47,1027.21 613.47,1028.46 cw(c618.47,1028.46) 618.47,1033.46 646.35,1033.46 660.82,1033.46 683.6,1010.68 683.6,986.75 v1(683.07,986.22)
FMC_A14: U1.86 U2.H6 | length 389.3
  Top Layer [SIG] w5: v1(667.32,1003.94) 696.85,1003.94 702.01,998.78 U1.86
  Bottom Layer [SIG] w5: U2.H6 519.61,1008.86 572.11,1008.86 cw(c572.11,1003.86) 577.11,1003.86 577.11,996.96 ccw(c580.11,996.96) 580.11,993.96 584.11,993.96 ccw(c584.11,996.96) 587.11,996.96 587.11,1012.27 cw(c590.11,1012.27) 590.11,1015.27 594.11,1015.27 cw(c594.11,1012.27) 597.11,1012.27 597.11,981.99 ccw(c600.11,981.99) 600.11,978.99 604.11,978.99 ccw(c604.11,981.99) 607.11,981.99 607.11,1011.81 cw(c610.11,1011.81) 610.11,1014.81 614.11,1014.81 cw(c614.11,1011.81) 617.11,1011.81 617.11,981.99 ccw(c620.11,981.99) 620.11,978.99 624.11,978.99 ccw(c624.11,981.99) 627.11,981.99 627.11,1003.86 cw(c632.11,1003.86) 632.11,1008.86 659.22,1008.86 660.03,1008.86 664.95,1003.94 v1(667.32,1003.94)
FMC_A15: U1.103 U2.G5 | length 435.1
  Top Layer [SIG] w5: U1.103 582.45,1214.34 582.45,1169.52 v1(582.68,1169.29)
  Mid Layer 3 [3V3] w5: v1(555.12,979.78) 564.96,989.63 564.96,1035.43 564.96,1037.93 ccw(c559.96,1037.93) 559.96,1042.93 556.62,1042.93 cw(c556.62,1046.83) 552.72,1046.83 552.72,1052.03 cw(c556.62,1052.03) 556.62,1055.93 565.64,1055.93 ccw(c565.64,1059.83) 569.54,1059.83 569.54,1065.03 ccw(c565.64,1065.03) 565.64,1068.93 556.62,1068.93 cw(c556.62,1072.83) 552.72,1072.83 552.72,1078.03 cw(c556.62,1078.03) 556.62,1081.93 565.64,1081.93 ccw(c565.64,1085.83) 569.54,1085.83 569.54,1091.03 ccw(c565.64,1091.03) 565.64,1094.93 556.62,1094.93 cw(c556.62,1098.83) 552.72,1098.83 552.72,1104.03 cw(c556.62,1104.03) 556.62,1107.93 565.64,1107.93 ccw(c565.64,1111.83) 569.54,1111.83 569.54,1117.03 ccw(c565.64,1117.03) 565.64,1120.93 556.62,1120.93 cw(c556.62,1124.83) 552.72,1124.83 552.72,1130.03 cw(c556.62,1130.03) 556.62,1133.93 559.96,1133.93 ccw(c559.96,1138.93) 564.96,1138.93 564.96,1151.57 v1(582.68,1169.29)
  Bottom Layer [SIG] w5: U2.G5 493.19,963.5 538.84,963.5 v1(555.12,979.78)
FMC_A16: U1.73 U2.G4 | length 444.7
  Top Layer [SIG] w5: v1(688.98,787.4) 691.35,787.4 698.63,794.68 U1.73
  Bottom Layer [SIG] w5: U2.G4 464.57,996.06 562.99,996.06 598.43,960.63 613.49,960.63 693.36,880.76 693.36,865.7 693.45,865.61 693.45,791.87 v1(688.98,787.4)
FMC_A17: U1.74 U2.F4 | length 384.9
  Top Layer [SIG] w5: v1(659.45,811.02) 659.98,810.49 683.91,810.49 684.12,810.7 734.89,810.7 U1.74
  Mid Layer 3 [3V3] w5: v1(476.38,946.85) 477.75,946.85 494.03,930.57 537.47,930.57 543.45,936.56 592.97,936.56 659.45,870.08 v1(659.45,811.02)
  Bottom Layer [SIG] w5: U2.F4 449.14,948.5 474.73,948.5 v1(476.38,946.85)
FMC_A18: U1.75 U2.F3 | length 410.4
  Top Layer [SIG] w5: v1(677.17,826.77) 677.8,827.41 733.88,827.41 U1.75
  Mid Layer 3 [3V3] w5: v1(476.38,925.2) 478.35,925.2 612.2,791.34 662.79,791.34 677.17,805.72 v1(677.17,826.77)
  Bottom Layer [SIG] w5: U2.F3 435.04,933.07 466.13,933.07 474,925.2 v1(476.38,925.2)
FMC_CE: U1.117 U2.G3 | length 382.9
  Top Layer [SIG] w5: v1@360.24,1173.23 362.42,1175.41 U1.117
  Bottom Layer [SIG] w5: v1(362.2,1173.23) 362.2,1171.96 371.75,1162.42 371.75,1135.88 ccw(c376.75,1135.88) 376.75,1130.88 385.11,1130.88 cw(c385.11,1126.98) 389.01,1126.98 389.01,1121.78 cw(c385.11,1121.78) 385.11,1117.88 368.88,1117.88 ccw(c368.88,1113.98) 364.98,1113.98 364.98,1108.78 ccw(c368.88,1108.78) 368.88,1104.88 385.11,1104.88 cw(c385.11,1100.98) 389.01,1100.98 389.01,1095.78 cw(c385.11,1095.78) 385.11,1091.88 368.88,1091.88 ccw(c368.88,1087.98) 364.98,1087.98 364.98,1082.78 ccw(c368.88,1082.78) 368.88,1078.88 385.11,1078.88 cw(c385.11,1074.98) 389.01,1074.98 389.01,1069.78 cw(c385.11,1069.78) 385.11,1065.88 376.75,1065.88 ccw(c376.75,1060.88) 371.75,1060.88 371.75,1045.38 371.75,1002.27 381.89,992.13 405.51,992.13 U2.G3
FMC_D0: U1.76 U2.B6 | length 403
  Top Layer [SIG] w5: v1(677.17,850.39) 689.81,850.39 698.43,841.78 U1.76
  Bottom Layer [SIG] w5: U2.B6 537.4,801.18 553.15,801.18 555.65,801.18 ccw(c555.65,806.18) 560.65,806.18 560.65,819.45 cw(c564.55,819.45) 564.55,823.35 569.75,823.35 cw(c569.75,819.45) 573.65,819.45 573.65,786.57 ccw(c577.55,786.57) 577.55,782.67 582.75,782.67 ccw(c582.75,786.57) 586.65,786.57 586.65,815.97 cw(c590.55,815.97) 590.55,819.87 595.75,819.87 cw(c595.75,815.97) 599.65,815.97 599.65,786.57 ccw(c603.55,786.57) 603.55,782.67 608.75,782.67 ccw(c608.75,786.57) 612.65,786.57 612.65,796.18 cw(c617.65,796.18) 617.65,801.18 626.58,801.18 675.8,850.39 v1(677.17,850.39)
FMC_D1: U1.77 U2.C6 | length 414.9
  Top Layer [SIG] w5: v1(677.08,874.02) 682.9,874.02 699.43,857.48 U1.77
  Bottom Layer [SIG] w5: U2.C6 525.59,842.52 531.44,842.52 534.04,842.52 ccw(c534.04,846.42) 537.94,846.42 537.94,855.8 cw(c541.84,855.8) 541.84,859.7 547.04,859.7 cw(c547.04,855.8) 550.94,855.8 550.94,842.52 550.94,835.11 ccw(c554.84,835.11) 554.84,831.21 560.04,831.21 ccw(c560.04,835.11) 563.94,835.11 563.94,842.52 563.94,855.8 cw(c567.84,855.8) 567.84,859.7 573.04,859.7 cw(c573.04,855.8) 576.94,855.8 576.94,842.52 576.94,832.27 ccw(c580.84,832.27) 580.84,828.37 586.04,828.37 ccw(c586.04,832.27) 589.94,832.27 589.94,842.52 589.94,855.8 cw(c593.84,855.8) 593.84,859.7 599.04,859.7 cw(c599.04,855.8) 602.94,855.8 602.94,842.52 602.94,832.27 ccw(c606.84,832.27) 606.84,828.37 612.04,828.37 ccw(c612.04,832.27) 615.94,832.27 615.94,838.62 cw(c619.84,838.62) 619.84,842.52 628.94,842.52 629.92,842.52 661.42,874.02 v1(677.08,874.02)
FMC_D2: U1.108 U2.F6 | length 381.7
  Top Layer [SIG] w5: U1.108 503.72,1175.41 v1(509.84,1169.29)
  Mid Layer 3 [3V3] w5: v1(509.84,1169.29) 491.59,1151.04 491.59,1138.52 cw(c486.59,1138.52) 486.59,1133.52 486.03,1133.52 ccw(c486.03,1129.62) 482.13,1129.62 482.13,1124.42 ccw(c486.03,1124.42) 486.03,1120.52 494.83,1120.52 cw(c494.83,1116.62) 498.73,1116.62 498.73,1111.42 cw(c494.83,1111.42) 494.83,1107.52 486.03,1107.52 ccw(c486.03,1103.62) 482.13,1103.62 482.13,1098.42 ccw(c486.03,1098.42) 486.03,1094.52 494.83,1094.52 cw(c494.83,1090.62) 498.73,1090.62 498.73,1085.42 cw(c494.83,1085.42) 494.83,1081.52 486.03,1081.52 ccw(c486.03,1077.62) 482.13,1077.62 482.13,1072.42 ccw(c486.03,1072.42) 486.03,1068.52 486.59,1068.52 cw(c486.59,1063.52) 491.59,1063.52 491.59,1061.02 491.59,986.75 529.53,948.82 v1(529.53,946.85)
  Bottom Layer [SIG] w5: U2.F6 509.84,946.85 v1(529.53,946.85)
FMC_D3: U1.109 U2.G6 | length 398.3
  Top Layer [SIG] w5: U1.109 488.02,1165.52 507.87,1145.67 v1(507.87,1142.72)
  Mid Layer 3 [3V3] w5: v1(507.87,1142.72) 527.56,1123.03 527.56,1120.53 ccw(c532.56,1120.53) 532.56,1115.53 536.71,1115.53 cw(c536.71,1111.63) 540.61,1111.63 540.61,1106.43 cw(c536.71,1106.43) 536.71,1102.53 524.12,1102.53 ccw(c524.12,1098.63) 520.22,1098.63 520.22,1093.43 ccw(c524.12,1093.43) 524.12,1089.53 536.71,1089.53 cw(c536.71,1085.63) 540.61,1085.63 540.61,1080.43 cw(c536.71,1080.43) 536.71,1076.53 524.12,1076.53 ccw(c524.12,1072.63) 520.22,1072.63 520.22,1067.43 ccw(c524.12,1067.43) 524.12,1063.53 536.71,1063.53 cw(c536.71,1059.63) 540.61,1059.63 540.61,1054.43 cw(c536.71,1054.43) 536.71,1050.53 524.12,1050.53 ccw(c524.12,1046.63) 520.22,1046.63 520.22,1041.43 ccw(c524.12,1041.43) 524.12,1037.53 536.71,1037.53 cw(c536.71,1033.63) 540.61,1033.63 540.61,1028.43 cw(c536.71,1028.43) 536.71,1024.53 532.56,1024.53 ccw(c532.56,1019.53) 527.56,1019.53 527.56,1006.53 527.56,986.22 529.82,983.96 529.82,981.46 v1(531.5,979.78)
  Bottom Layer [SIG] w5: U2.G6 507.12,979.56 531.27,979.56 v1(531.5,979.78)
FMC_D4: U1.53 U2.B1 | length 388.1
  Top Layer [SIG] w5: U1.53 503.72,663.17 511.81,671.26 v1(511.81,685.04)
  Mid Layer 3 [3V3] w5: v1(334.65,822.83) 334.65,791.34 339.24,786.74 345.68,780.31 cw(c342.92,777.55) 345.68,774.79 338.87,767.98 ccw(c341.62,765.22) 338.87,762.47 342.54,758.79 ccw(c345.3,761.55) 348.06,758.79 355.02,765.75 cw(c357.63,763.14) 360.24,765.75 419.29,706.69 490.16,706.69 v1(511.81,685.04)
  Bottom Layer [SIG] w5: v1(334.65,822.83) 344.49,832.68 358.27,832.68 U2.B1
FMC_D5: U1.54 U2.C1 | length 392.3
  Top Layer [SIG] w5: U1.54 519.42,645.41 527.93,653.92 527.93,666.71 v1(529.53,668.31)
  Mid Layer 3 [3V3] w5: v1(332.68,852.36) 354.33,830.71 354.33,807.09 440.94,720.47 499.4,720.47 529.53,690.35 v1(529.53,668.31)
  Bottom Layer [SIG] w5: v1(332.68,852.36) 341.54,861.22 U2.C1
FMC_D6: U1.55 U2.F1 | length 435.8
  Top Layer [SIG] w5: U1.55 535.12,644.43 546.71,656.02 v1(546.71,682.54)
  Mid Layer 3 [3V3] w5: v1(409.45,923.23) 458.66,874.02 458.66,807.09 546.71,719.04 v1(546.71,682.54)
  Bottom Layer [SIG] w5: U2.F1 385.83,923.23 v1(409.45,923.23)
FMC_D7: U1.56 U2.G1 | length 468.5
  Top Layer [SIG] w5: U1.56 550.82,641.99 561.31,652.48 561.31,664.85 v1(562.99,666.53)
  Mid Layer 3 [3V3] w5: v1(389.27,950.79) 404.91,950.79 470.47,885.23 470.47,812.99 562.99,720.47 v1(562.99,666.53)
  Bottom Layer [SIG] w5: U2.G1 387.8,950.79 v1(389.27,950.79)
FMC_OE: U1.114 U2.G2 | length 375.4
  Top Layer [SIG] w5: v1@409.45,1171.26 v1(409.52,1171.33) U1.114
  Bottom Layer [SIG] w5: U2.G2 376.09,979.33 363.29,992.13 346.46,992.13 326.77,1011.81 326.77,1165.35 354.33,1192.91 387.94,1192.91 v1(409.52,1171.33)
FMC_WE: U1.115 U2.B3 | length 416.2
  Top Layer [SIG] w5: v1(387.8,858.27) 368.64,877.42 368.64,1153.48 393.82,1178.65 U1.115
  Bottom Layer [SIG] w5: v1(387.8,858.27) 391.73,858.27 U2.B3
GND: C1.1 C2.1 C3.1 C4.1 C5.1 C6.1 C7.2 C8.1 C9.1 C10.1 C11.1 C12.1 C13.1 C14.1 C15.1 C16.2 C17.1 C18.1 C19.1 C20.2 C21.1 C22.1 IC2.1 IC2.2 IC2.3 IC2.4 J2.1 J3.7 J3.8 J3.9 J3.10 J3.11 R3.1 U1.12 U1.30 U1.42 U1.46 U1.63 U1.78 U1.94 U1.110 U1.127 U2.D1 U2.E6 VR1.1 Y1.2 | length 188.1
  Bottom Layer [SIG] w10: C22.1@269.69,883.86 271.65,881.89 307.09,881.89 v1(315.95,890.75) U2.D1 ; U2.E6 v1(550.2,920.28) 559.06,929.13 594.49,929.13 C21.1@596.46,927.17
  other v1: 578.74,683.07 369.61,689.83 421.26,694.88 535.43,704.72 669.29,777.56 190.94,789.37 433.07,816.93 312.99,834.65 645.67,838.58 373.55,845.35 661.42,893.7 478.35,901.57 183.07,913.39 659.45,946.85 555.12,954.72 462.13,965.42 405.51,966.54 179.13,974.41 649.61,988.19 194.88,1041.34 342.52,1053.15 614.17,1076.77 588.58,1145.67 411.42,1147.64 529.53,1151.57 346.46,1153.54
LED: D1.1
LSE_IN: C19.2 U1.8 X1.1
LSE_OUT: C18.2 U1.9 X1.2
NetD1_2: D1.2 R3.2
NRST: J2.5 U1.21
OSC_OUT: U1.19 Y1.3
PE2: J3.75 U1.1
PE3: J3.73 U1.2
PE4: J3.71 U1.3
PE5: J3.69 U1.4
PE6: J3.67 U1.5
SCL: IC2.6 R1.2
SDA: IC2.5 R2.2
SWCLK: J2.4 U1.98
SWDIO: J2.3 U1.96
UART3_RX: J2.7 U1.101
UART3_TX: J2.6 U1.100
Vref+: J1.1 U1.43 U1.44
pads on no net: IC2.7 J2.8 J2.9 J2.10 J3.21 J3.22 J3.23 J3.24 J3.25 J3.26 J3.27 J3.28 J3.29 J3.30 J3.31 J3.32 J3.33 J3.34 J3.35 J3.36 J3.37 J3.38 J3.39 J3.40 J3.41 J3.42 J3.43 J3.44 J3.45 J3.46 J3.47 J3.48 J3.49 J3.50 J3.51 J3.52 J3.53 J3.54 J3.55 J3.56 J3.57 J3.58 J3.59 J3.60 J3.61 J3.62 J3.63 J3.64 J3.65 J3.66 J3.68 J3.70 J3.72 J3.74 U1.6 U1.7 U1.16 U1.17 U1.20 U1.22 U1.23 U1.24 U1.25 U1.27 U1.28 U1.29 U1.32 U1.33 U1.34 U1.35 U1.36 U1.37 U1.38 U1.39 U1.40 U1.41 U1.48 U1.57 U1.58 U1.59 U1.60 U1.61 U1.62 U1.65 U1.66 U1.67 U1.68 U1.69 U1.70 U1.71 U1.72 U1.80 U1.81 U1.87 U1.88 U1.89 U1.90 U1.91 U1.92 U1.93 U1.97 U1.99 U1.102 U1.104 U1.105 U1.106 U1.107 U1.112 U1.113 U1.116 U1.118 U1.119 U1.120 U1.121 U1.122 U1.123 U1.124 U1.125 U1.126 U2.A3 U2.C3

## Polygon pours and split planes (outlines as drawn)
GND on Mid Layer 1 [GND] "NONET_L04_P-001" (solid, shelved, pour order 8): 0,1653.54 870.08,1653.54 870.08,0 0,0
GND on Mid Layer 1 [GND] "Mid Layer 1-GND" (solid, shelved, pour order 0): 0,1653.54 870.08,1653.54 870.08,0 0,0
GND on Mid Layer 4 [GND] "NONET_L04_P-001" (solid, shelved, pour order 7): 0,1653.54 870.08,1653.54 870.08,0 0,0
GND on Mid Layer 4 [GND] "Mid Layer 4-GND" (solid, shelved, pour order 6): 0,1653.54 870.08,1653.54 870.08,0 0,0

## Silkscreen, mask and mechanical layers (free items; w line width, h text height)
Mechanical 1:
  lines w3.94: 0,179.13 0,1653.54 ; 868.11,179.13 868.11,1653.54
  lines w5: 0,1653.54 868.11,1653.54

## Text inside footprints (layer, text, board x,y; h text height)
U1: Top Overlay "*" at 66.79,1153.63 h50; Top 3D Body "*" at 160.07,1138.63 h50